# Altium PCB DSP6748_F.PcbDoc (part 5 of 16)
Units mil, origin at the board's own origin, x right, y up, seen from the top; angles counter-clockwise.
Board outline 8188.98 x 4055.12 mil, 4 copper layers (Top Layer, GND, VCC, Bottom Layer); 409 components, 262 nets, 1424 pads, 350 vias.
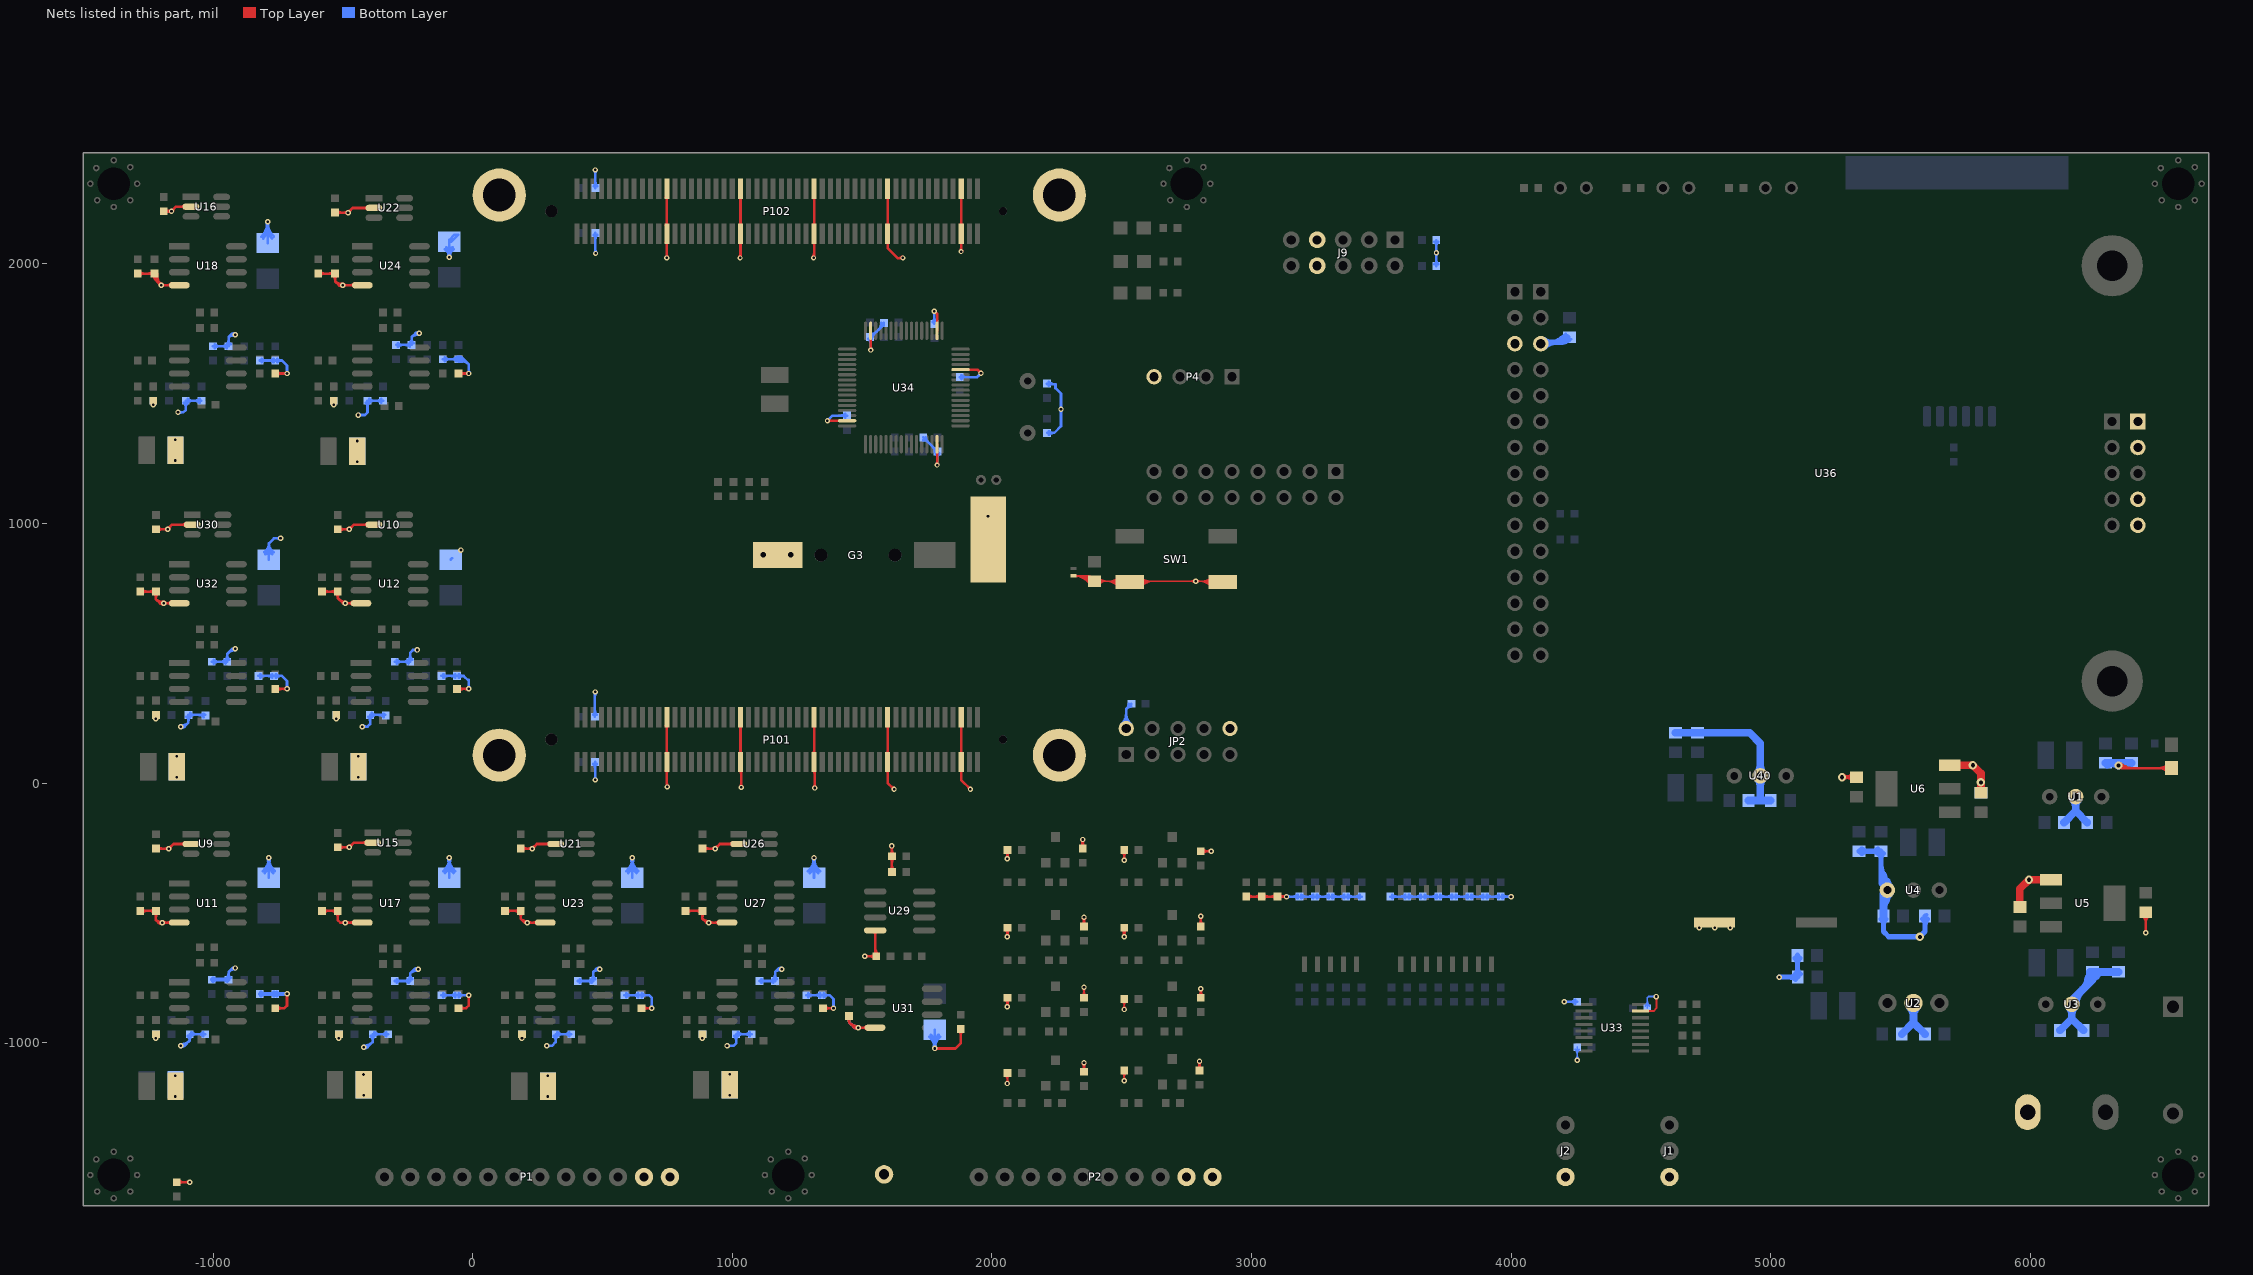
[diagram p7: the nets of this part, all layers, seen from the top]

## Via types
v1: diameter 21, hole 10, Top Layer to Bottom Layer, 244 vias
v2: diameter 20, hole 10, Top Layer to Bottom Layer, 84 vias
v3: diameter 32, hole 16, Top Layer to Bottom Layer, 11 vias
v4: diameter 24, hole 12, Top Layer to Bottom Layer, 7 vias
v5: diameter 39.37, hole 19.68, Top Layer to Bottom Layer, 3 vias
v6: diameter 30, hole 15, Top Layer to Bottom Layer, 1 vias

## Nets (pads, with @x,y where several pads share a name; then routed paths per layer and width w, separated by ;. In a path a pad name is that pad's centre, name@x,y a point inside that pad or via, vN(x,y) a via of type N, cw(c..) or ccw(c..) an arc to the next point about the centre after c; other vN are vias at no path point) (continued)
GND: (continued)
  Top Layer w10: C138.1@2811.88,-255.41 ccw(c2828.95,-238.34) 2828.95,-262.48 ; 2831.53,-262.48 cw(c2831.53,-275.76) v1@2840.92,-266.37 ; 2831.53,-262.48 ccw(c2831.53,-249.2) v1@2840.92,-258.59 ; 2831.53,-262.48 cw(c2831.53,-275.76) v1@2840.92,-266.37 ; 2831.53,-262.48 ccw(c2831.53,-249.2) v1@2840.92,-258.59 ; 2831.53,-262.48 ccw(c2831.53,-249.2) v1@2840.92,-258.59 ; 2831.53,-262.48 cw(c2831.53,-275.76) v1@2840.92,-266.37 ; R129.1@2986.88,-444.55 cw(c3003.95,-461.62) 3003.95,-437.48 ; R129.1@2986.88,-444.55 cw(c3003.95,-461.62) 3003.95,-437.48 ; R129.1@2986.88,-444.55 cw(c3003.95,-461.62) 3003.95,-437.48 ; R129.1@2986.88,-430.41 ccw(c3003.95,-413.34) 3003.95,-437.48 ; R129.1@2986.88,-430.41 ccw(c3003.95,-413.34) 3003.95,-437.48 ; R129.1@2986.88,-430.41 ccw(c3003.95,-413.34) 3003.95,-437.48 ; 3015.67,-437.48 cw(c3015.67,-461.62) R130.1@3032.74,-444.55 ; 3015.67,-437.48 ccw(c3015.67,-413.34) R130.1@3032.74,-430.41 ; 3015.67,-437.48 cw(c3015.67,-461.62) R130.1@3032.74,-444.55 ; 3015.67,-437.48 ccw(c3015.67,-413.34) R130.1@3032.74,-430.41 ; 3015.67,-437.48 ccw(c3015.67,-413.34) R130.1@3032.74,-430.41 ; 3015.67,-437.48 cw(c3015.67,-461.62) R130.1@3032.74,-444.55 ; R130.1@3046.88,-444.55 cw(c3063.95,-461.62) 3063.95,-437.48 ; R130.1@3046.88,-444.55 cw(c3063.95,-461.62) 3063.95,-437.48 ; R130.1@3046.88,-444.55 cw(c3063.95,-461.62) 3063.95,-437.48 ; R130.1@3046.88,-430.41 ccw(c3063.95,-413.34) 3063.95,-437.48 ; R130.1@3046.88,-430.41 ccw(c3063.95,-413.34) 3063.95,-437.48 ; R130.1@3046.88,-430.41 ccw(c3063.95,-413.34) 3063.95,-437.48 ; 3075.67,-437.48 cw(c3075.67,-461.62) R131.1@3092.74,-444.55 ; 3075.67,-437.48 ccw(c3075.67,-413.34) R131.1@3092.74,-430.41 ; 3075.67,-437.48 cw(c3075.67,-461.62) R131.1@3092.74,-444.55 ; 3075.67,-437.48 ccw(c3075.67,-413.34) R131.1@3092.74,-430.41 ; 3075.67,-437.48 ccw(c3075.67,-413.34) R131.1@3092.74,-430.41 ; 3075.67,-437.48 cw(c3075.67,-461.62) R131.1@3092.74,-444.55 ; R131.1@3106.88,-444.55 cw(c3123.95,-461.62) 3123.95,-437.48 ; R131.1@3106.88,-444.55 cw(c3123.95,-461.62) 3123.95,-437.48 ; R131.1@3106.88,-444.55 cw(c3123.95,-461.62) 3123.95,-437.48 ; R131.1@3106.88,-430.41 ccw(c3123.95,-413.34) 3123.95,-437.48 ; R131.1@3106.88,-430.41 ccw(c3123.95,-413.34) 3123.95,-437.48 ; R131.1@3106.88,-430.41 ccw(c3123.95,-413.34) 3123.95,-437.48 ; v3@6340.52,68.23 ccw(c6366.37,94.08) 6366.37,57.52 ; v3@6340.52,68.23 ccw(c6366.37,94.08) 6366.37,57.52 ; v3@6340.52,68.23 ccw(c6366.37,94.08) 6366.37,57.52 ; v3@6347.59,75.3 ccw(c6390.51,118.22) 6390.51,57.52 ; v3@6347.59,75.3 ccw(c6390.51,118.22) 6390.51,57.52 ; v3@6347.59,75.3 ccw(c6390.51,118.22) 6390.51,57.52 ; 6356.42,59.04 ccw(c6351.68,50.84) 6346.19,58.56 cw(c6351.68,50.84) 6356.42,59.04 ; 6356.42,59.04 cw(c6362.07,68.83) 6350.79,68.17 ccw(c6362.07,68.83) 6356.42,59.04 ; C20.2@6432.44,-509.85 cw(c6402.56,-539.73) 6444.81,-539.73 ; C20.2@6432.44,-509.85 cw(c6402.56,-539.73) 6444.81,-539.73 ; C20.2@6432.44,-509.85 cw(c6402.56,-539.73) 6444.81,-539.73 ; v1@6440.92,-573.59 ccw(c6431.53,-564.2) 6444.81,-564.2 ; v1@6440.92,-573.59 ccw(c6431.53,-564.2) 6444.81,-564.2 ; v1@6440.92,-573.59 ccw(c6431.53,-564.2) 6444.81,-564.2 ; 6444.81,-564.2 ccw(c6458.09,-564.2) v1@6448.7,-573.59 ; 6444.81,-564.2 ccw(c6458.09,-564.2) v1@6448.7,-573.59 ; 6444.81,-564.2 ccw(c6458.09,-564.2) v1@6448.7,-573.59 ; 6444.81,-539.73 cw(c6487.06,-539.73) C20.2@6457.18,-509.85 ; 6444.81,-539.73 cw(c6487.06,-539.73) C20.2@6457.18,-509.85 ; 6444.81,-539.73 cw(c6487.06,-539.73) C20.2@6457.18,-509.85 ; 6496.53,57.52 cw(c6496.53,9.24) D7.K@6530.67,43.38 ; 6496.53,57.52 ccw(c6496.53,105.8) D7.K@6530.67,71.66 ; 6496.53,57.52 cw(c6496.53,9.24) D7.K@6530.67,43.38 ; 6496.53,57.52 ccw(c6496.53,105.8) D7.K@6530.67,71.66 ; 6496.53,57.52 ccw(c6496.53,105.8) D7.K@6530.67,71.66 ; 6496.53,57.52 cw(c6496.53,9.24) D7.K@6530.67,43.38 ; C81.1@-1216.03,1958.51 ccw(c-1190.42,1947.29) -1210.19,1927.52 cw(c-1190.42,1947.29) C81.1@-1216.03,1958.51 ; -1211.25,1929.35 ccw(c-1200.28,1935.68) -1200.22,1923.02 cw(c-1200.28,1935.68) -1211.25,1929.35 ; v3@6340.52,66.81 cw(c6350.89,56.47) 6358.22,69.16 ccw(c6350.89,56.47) v3@6340.52,66.81 ; v3@6347.6,59.76 cw(c6360.43,46.97) 6369.48,62.66 ccw(c6360.43,46.97) v3@6347.6,59.76
  Top Layer w15: v3(5274.81,22.52) C22.2@5329.81,22.52 ; v3@5280.82,16.51 cw(c5295.33,2) 5295.33,22.52 ; v3@5280.82,16.51 cw(c5295.33,2) 5295.33,22.52 ; v3@5280.82,16.51 cw(c5295.33,2) 5295.33,22.52 ; v3@5280.82,28.53 ccw(c5295.33,43.04) 5295.33,22.52 ; v3@5280.82,28.53 ccw(c5295.33,43.04) 5295.33,22.52 ; v3@5280.82,28.53 ccw(c5295.33,43.04) 5295.33,22.52 ; 5291.1,22.52 cw(c5291.1,-13.69) C22.2@5316.7,11.91 ; 5291.1,22.52 ccw(c5291.1,58.73) C22.2@5316.7,33.13 ; 5291.1,22.52 cw(c5291.1,-13.69) C22.2@5316.7,11.91 ; 5291.1,22.52 ccw(c5291.1,58.73) C22.2@5316.7,33.13 ; 5291.1,22.52 ccw(c5291.1,58.73) C22.2@5316.7,33.13 ; 5291.1,22.52 cw(c5291.1,-13.69) C22.2@5316.7,11.91
  Top Layer w30: U6.3@5689.81,68.62 v3(5778.71,68.62) 5809.81,37.52 v3(5809.81,2.52) C19.2@5809.81,-37.48 ; C18.2@5959.81,-477.48 5959.81,-407.48 v3(5994.81,-372.48) U5.1@6079.81,-372.48
  Bottom Layer w7: v1(4254.81,-1067.48) C163.2@4254.81,-1017.48 ; C160.1@4524.81,-867.48 4524.81,-827.48 4529.81,-822.48 v1(4559.81,-822.48) ; v1@4554.86,-827.43 ccw(c4542.91,-839.38) 4542.91,-822.48 ccw(c4542.91,-805.58) v1@4554.86,-817.53 ; C163.2@4246.68,-1025.61 cw(c4227.05,-1045.24) 4254.81,-1045.24 ; C163.2@4246.68,-1025.61 cw(c4227.05,-1045.24) 4254.81,-1045.24 ; C163.2@4246.68,-1025.61 cw(c4227.05,-1045.24) 4254.81,-1045.24 ; v1@4249.86,-1062.53 ccw(c4237.91,-1050.58) 4254.81,-1050.58 ; v1@4249.86,-1062.53 ccw(c4237.91,-1050.58) 4254.81,-1050.58 ; v1@4249.86,-1062.53 ccw(c4237.91,-1050.58) 4254.81,-1050.58 ; 4254.81,-1050.58 ccw(c4271.71,-1050.58) v1@4259.76,-1062.53 ; 4254.81,-1050.58 ccw(c4271.71,-1050.58) v1@4259.76,-1062.53 ; 4254.81,-1050.58 ccw(c4271.71,-1050.58) v1@4259.76,-1062.53 ; 4254.81,-1045.24 cw(c4282.57,-1045.24) C163.2@4262.94,-1025.61 ; 4254.81,-1045.24 cw(c4282.57,-1045.24) C163.2@4262.94,-1025.61 ; 4254.81,-1045.24 cw(c4282.57,-1045.24) C163.2@4262.94,-1025.61 ; C160.1@4516.68,-859.35 ccw(c4497.05,-839.72) 4524.81,-839.72 ; C160.1@4516.68,-859.35 ccw(c4497.05,-839.72) 4524.81,-839.72 ; C160.1@4516.68,-859.35 ccw(c4497.05,-839.72) 4524.81,-839.72 ; 4524.81,-839.72 ccw(c4552.57,-839.72) C160.1@4532.94,-859.35 ; 4524.81,-839.72 ccw(c4552.57,-839.72) C160.1@4532.94,-859.35 ; 4524.81,-839.72 ccw(c4552.57,-839.72) C160.1@4532.94,-859.35